# EAGLE board IR PCB (EAGLE 9.6.2)
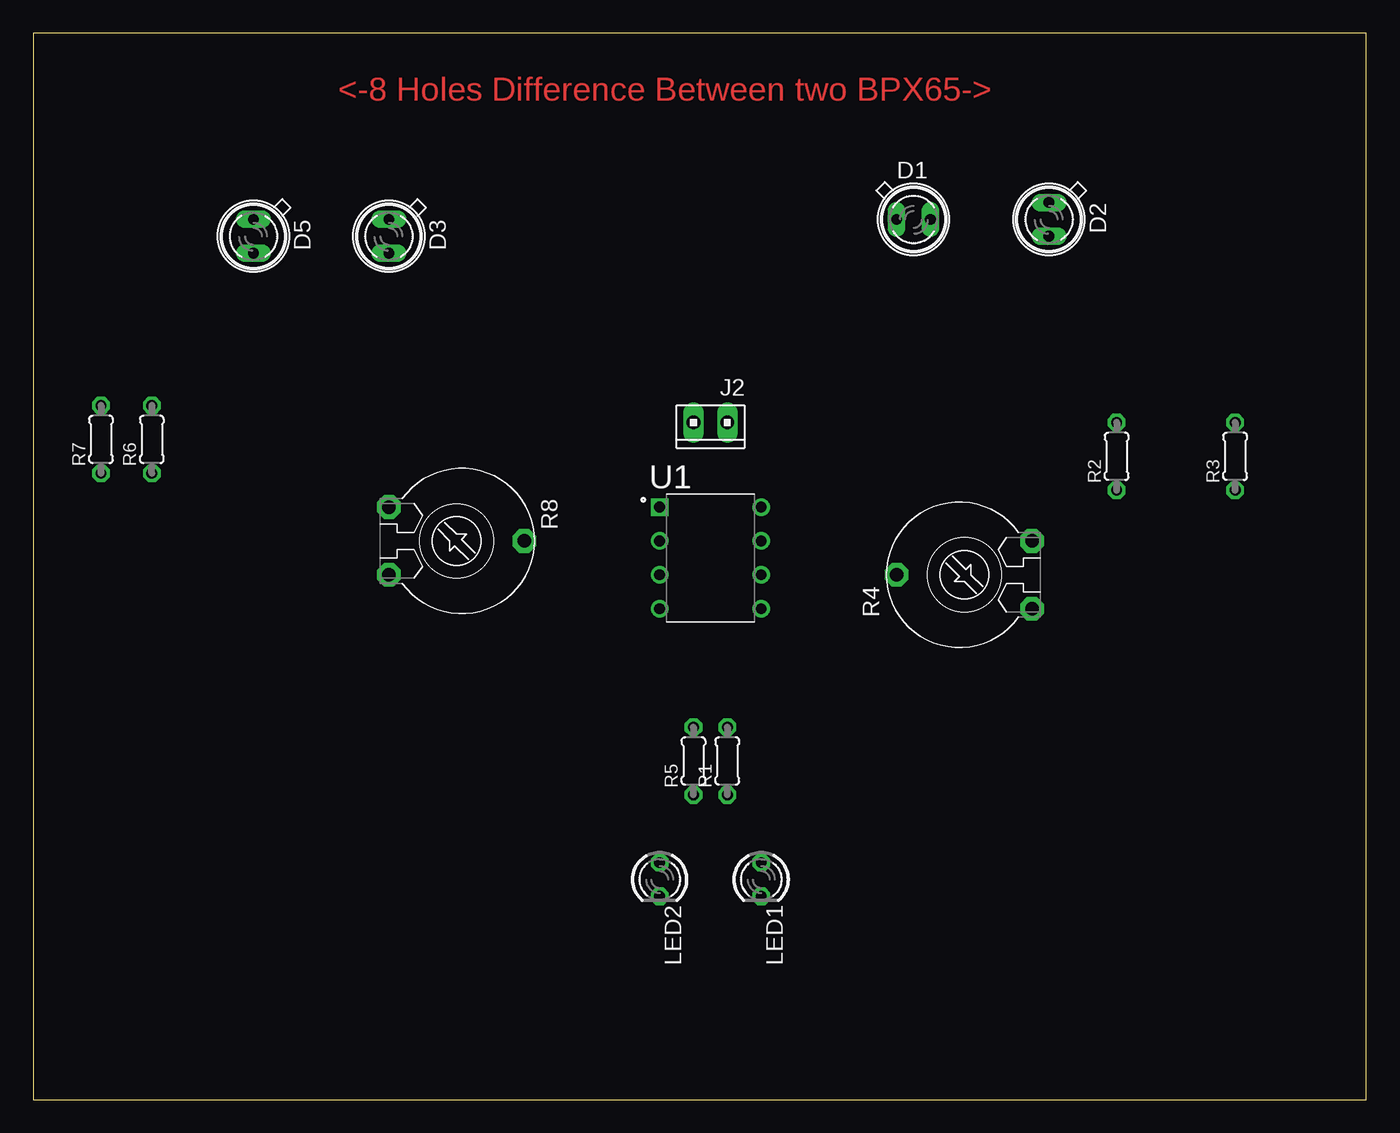
[diagram p0: board, top side]
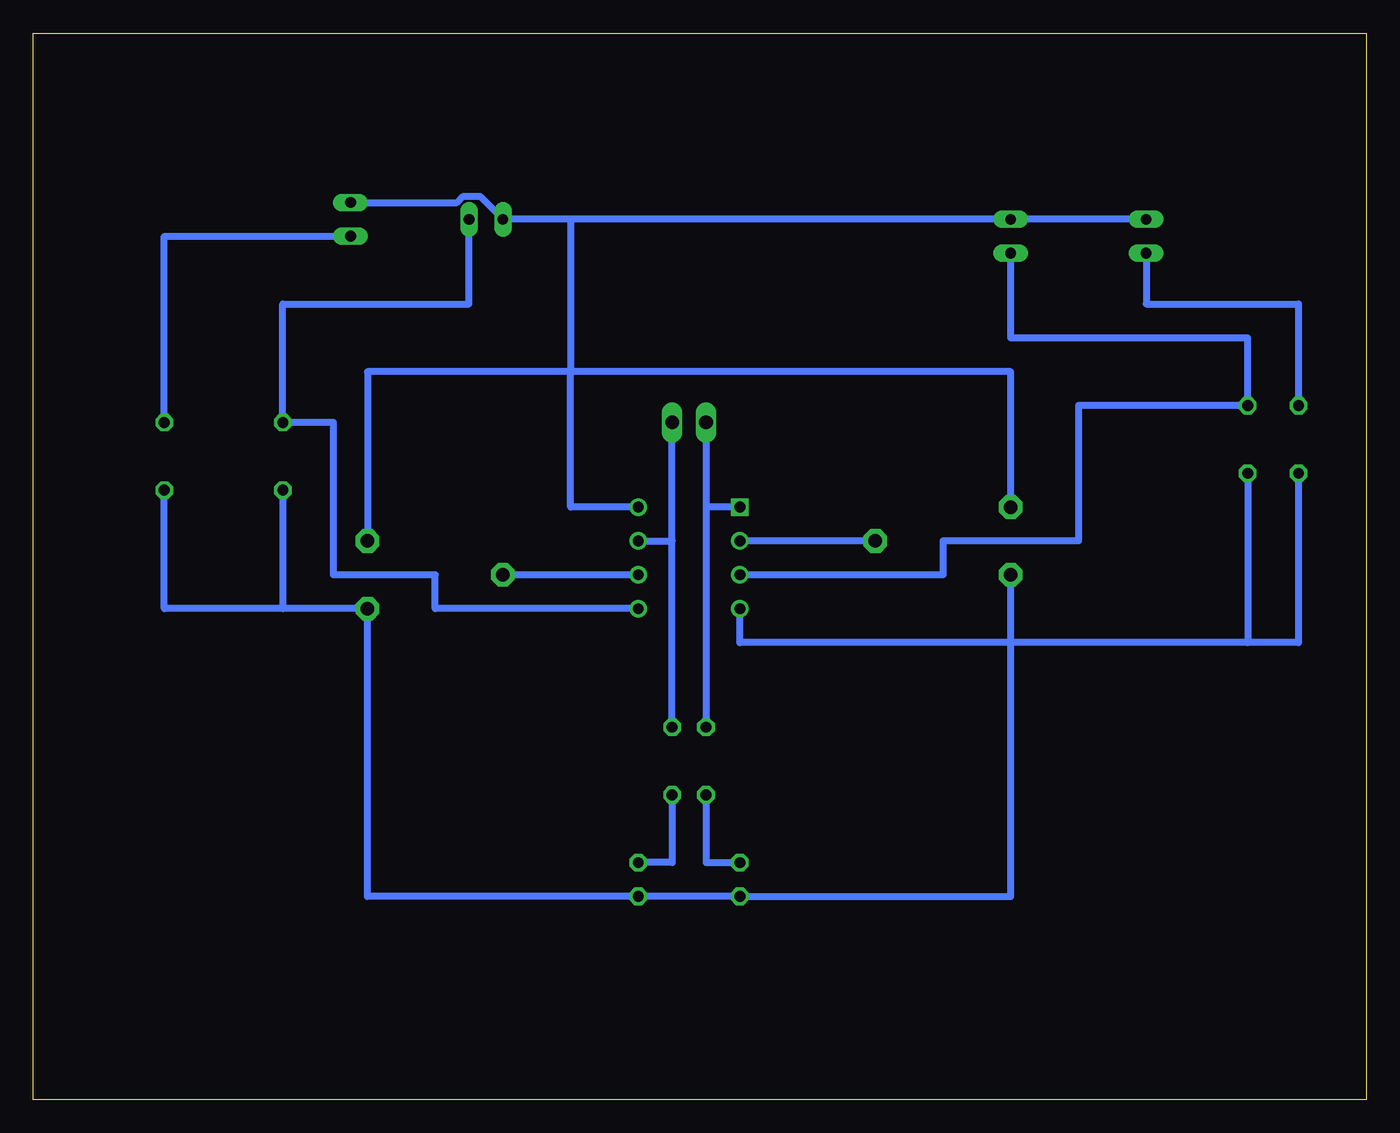
[diagram p1: board, bottom side, seen from below]

Size 100 x 80 mm. Coordinates in mm from the lower left corner, seen from the top.
Outline: 0,0 100,0 100,80 0,80 0,0
Copper layers (1*16): Top 0.035mm / dielectric 1.5mm / Bottom 0.035mm
Design rules "default": minimum track width 6mil, minimum drill 0.35mm, track to track 6mil, track to pad 6mil, pad to pad 6mil, via to via 6mil, smd to smd 6mil, copper to edge 40mil, drill to drill 6mil, minimum pad ring 10mil, minimum via ring 8mil, stop-mask expansion 4mil, vias tented up to drill 0mil, thermal gap 10mil

## Footprints (pad centres in the part's own frame; a part is rotated, then mirrored left to right if it is on the bottom)
SFH482 = drill 0.813 long: A -1.27,0; K 1.27,0
10X02MTA = drill 1.016 long: 1 1.27,0; 2 -1.27,0
LED3MM = drill 0.813 octagon: A -1.27,0; K 1.27,0
0204/5 = drill 0.813 octagon: 1 -2.54,0; 2 2.54,0
PT-10 = drill 1.016 pad 1.778 octagon: 1 -2.54,-5.08; 2 2.54,-5.08; 3 0,5.08
DIP762W46P254L960H508Q8 = drill 0.81 pad 1.22 square: 1 -3.81,3.81 | drill 0.81 pad 1.22: 2 -3.81,1.27; 3 -3.81,-1.27; 4 -3.81,-3.81; 5 3.81,-3.81; 6 3.81,-1.27; 7 3.81,1.27; 8 3.81,3.81

## Placement (x,y rotation side)
D1  SFH482  [SFH482]  66.04,66.04 0 top
D2  SFH482  [SFH482]  76.2,66.04 270 top
D3  SFH482  [SFH482]  26.67,64.77 270 top
D5  SFH482  [SFH482]  16.51,64.77 270 top
J2  [10X02MTA]  50.8,50.8 180 top
LED1  [LED3MM]  54.61,16.51 270 top
LED2  [LED3MM]  46.99,16.51 270 top
R1  [0204/5]  52.07,25.4 90 top
R2  [0204/5]  81.28,48.26 90 top
R3  [0204/5]  90.17,48.26 90 top
R4  [PT-10]  69.85,39.37 90 top
R5  [0204/5]  49.53,25.4 90 top
R6  [0204/5]  8.89,49.53 90 top
R7  [0204/5]  5.08,49.53 90 top
R8  [PT-10]  31.75,41.91 270 top
U1  LM358N  [DIP762W46P254L960H508Q8]  50.8,40.64 0 top

## Library data of the parts
D1-D3 D5 LED1 LED2 = led
J2 = con-amp
R1-R3 R5-R7 = rcl; SPICEPREFIX: R
R4 R8 = rcl; SPICEMODEL: POT; SPICEPREFIX: X
U1 = LM358N; AVAILABILITY: Not in stock; CHECK_PRICES: https://www.snapeda.com/parts/LM358N/Harris/view-part/?ref=eda; DESCRIPTION: General Purpose Amplifier 2 Circuit 8-PDIP; MF: Harris Corporation; MP: LM358N; PACKAGE: None; PRICE: None; SNAPEDA_LINK: https://www.snapeda.com/parts/LM358N/Harris/view-part/?ref=snap

## Nets
N$1: R4.3 U1.6
N$2: J2.2 R1.2 U1.7
N$3: D3.K R6.2 U1.3
N$4: LED1.A R1.1
N$6: D2.K R3.2
N$7: D1.K R2.2 U1.5
N$8: R8.3 U1.2
N$10: J2.1 R5.2 U1.1
N$11: LED2.A R5.1
N$12: LED1.K LED2.K R2.1 R3.1 R4.1 R6.1 R7.1 R8.2 U1.4
N$13: D1.A D2.A D3.A D5.A R4.2 R8.1 U1.8
N$14: D5.K R7.2

## Tracks (layer width: path | path; a pad name or v marks a point on that pad's centre or on a via)
N$1
  Bottom 0.508: U1.6 R4.3
N$2
  Bottom 0.508: R1.2 52.07,41.91 | 52.07,41.91 J2.2 | U1.7 52.07,41.91
N$3
  Bottom 0.508: U1.3 31.75,39.37 31.75,41.91 21.59,41.91 21.59,52.07 R6.2 8.89,57.15 26.67,57.15 D3.K
N$4
  Bottom 0.508: R1.1 52.07,17.78 LED1.A
N$6
  Bottom 0.508: R3.2 90.17,64.77 D2.K
N$7
  Bottom 0.508: U1.5 69.85,36.83 69.85,39.37 77.47,39.37 77.47,50.8 R2.2 81.28,59.69 67.31,59.69 D1.K
N$8
  Bottom 0.508: R8.3 U1.2
N$10
  Bottom 0.508: J2.1 49.53,44.45 | 49.53,44.45 R5.2 | U1.1 49.53,44.45
N$11
  Bottom 0.508: R5.1 49.53,17.78 LED2.A
N$12
  Bottom 0.508: 26.67,34.29 26.67,15.24 LED2.K LED1.K 74.93,15.24 R4.1 81.28,36.83 | 81.28,36.83 90.17,36.83 R3.1 | R2.1 81.28,36.83 | R7.1 5.08,34.29 8.89,34.29 | 8.89,34.29 26.67,34.29 | 26.67,34.29 46.99,34.29 U1.4 | R6.1 8.89,34.29 | 26.67,34.29 R8.2
N$13
  Bottom 0.508: D5.A D3.A 59.69,66.04 | R8.1 26.67,54.61 59.69,54.61 | 59.69,66.04 D1.A 66.5,67.77 67.75,67.77 68.21,67.31 D2.A | 59.69,66.04 59.69,54.61 | U1.8 59.69,44.45 59.69,54.61 | 59.69,54.61 74.93,54.61 R4.2
N$14
  Bottom 0.508: R7.2 5.08,59.69 16.51,59.69 D5.K

## Text on the board
Top: <-8 Holes Difference Between two BPX65->